# Altium PCB PCB1.PcbDoc
Units mil, origin at the board's own origin, x right, y up, seen from the top; angles counter-clockwise.
Board outline 6000 x 4000 mil, 2 copper layers (Top Layer, Bottom Layer); 5 components, 0 nets, 70 pads, 18 vias.
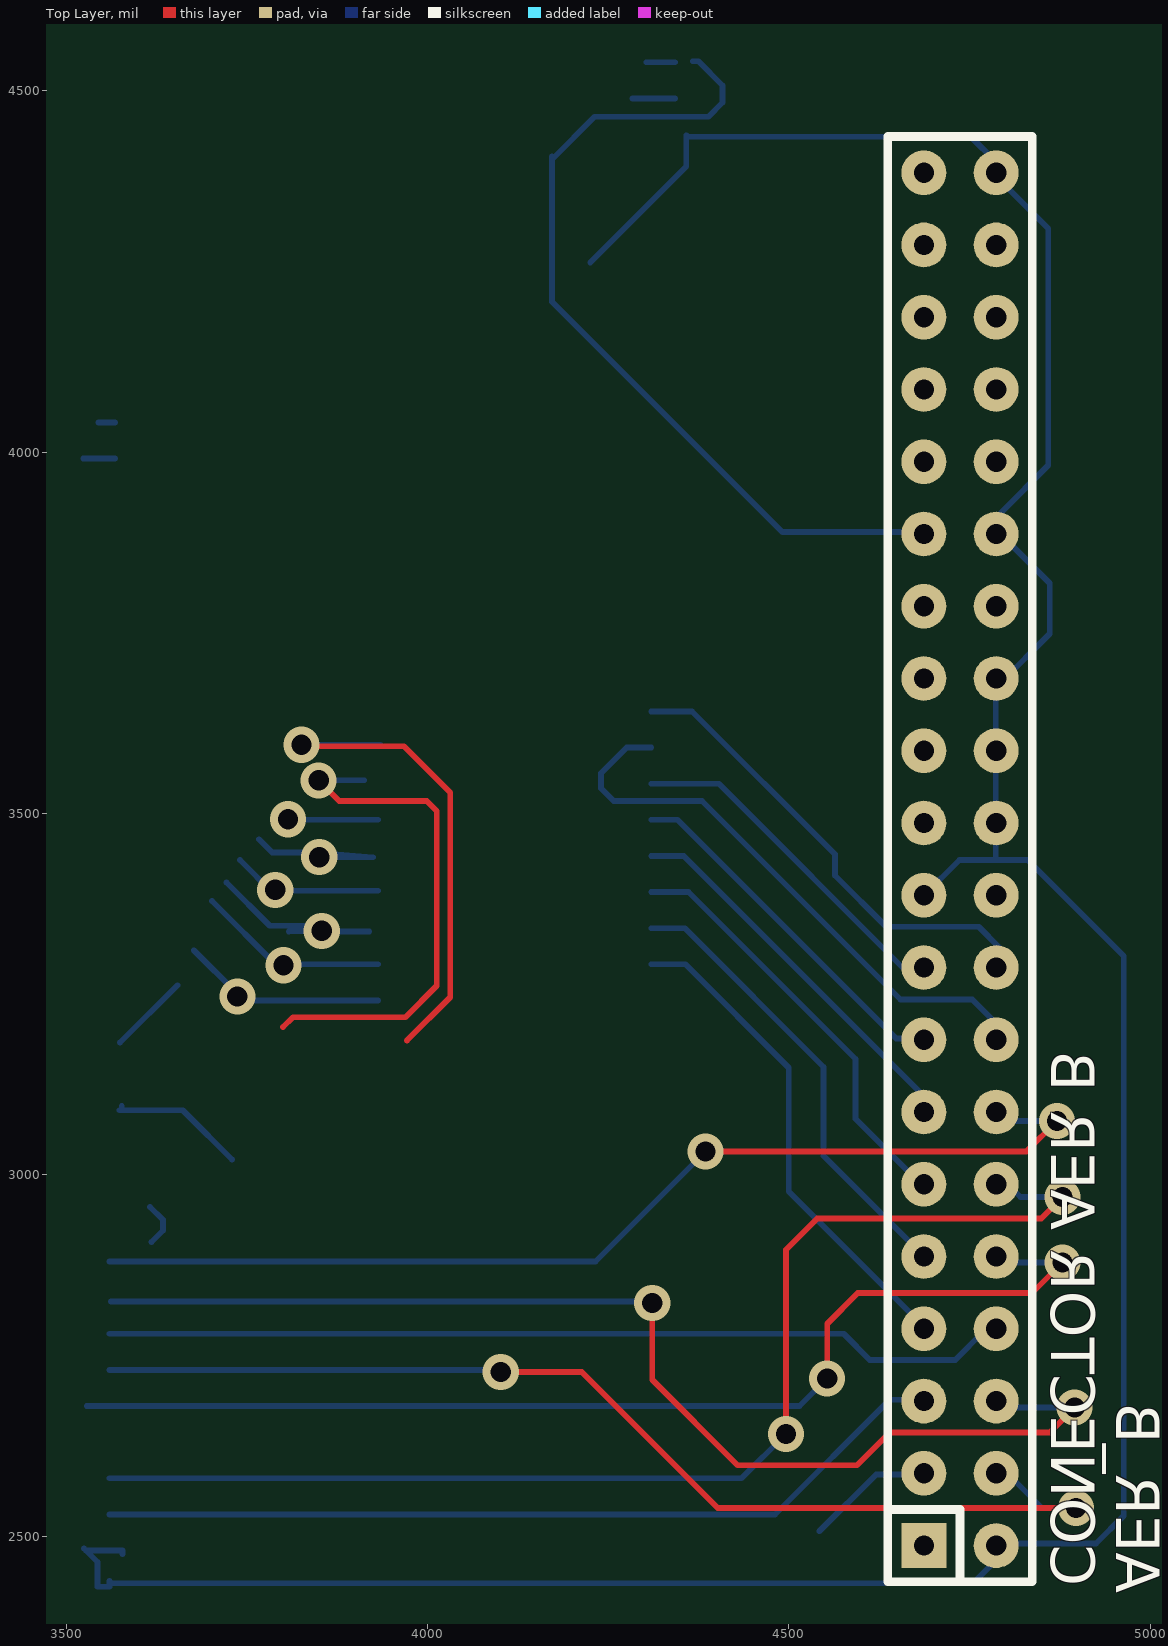
[diagram p0: Top Layer view]
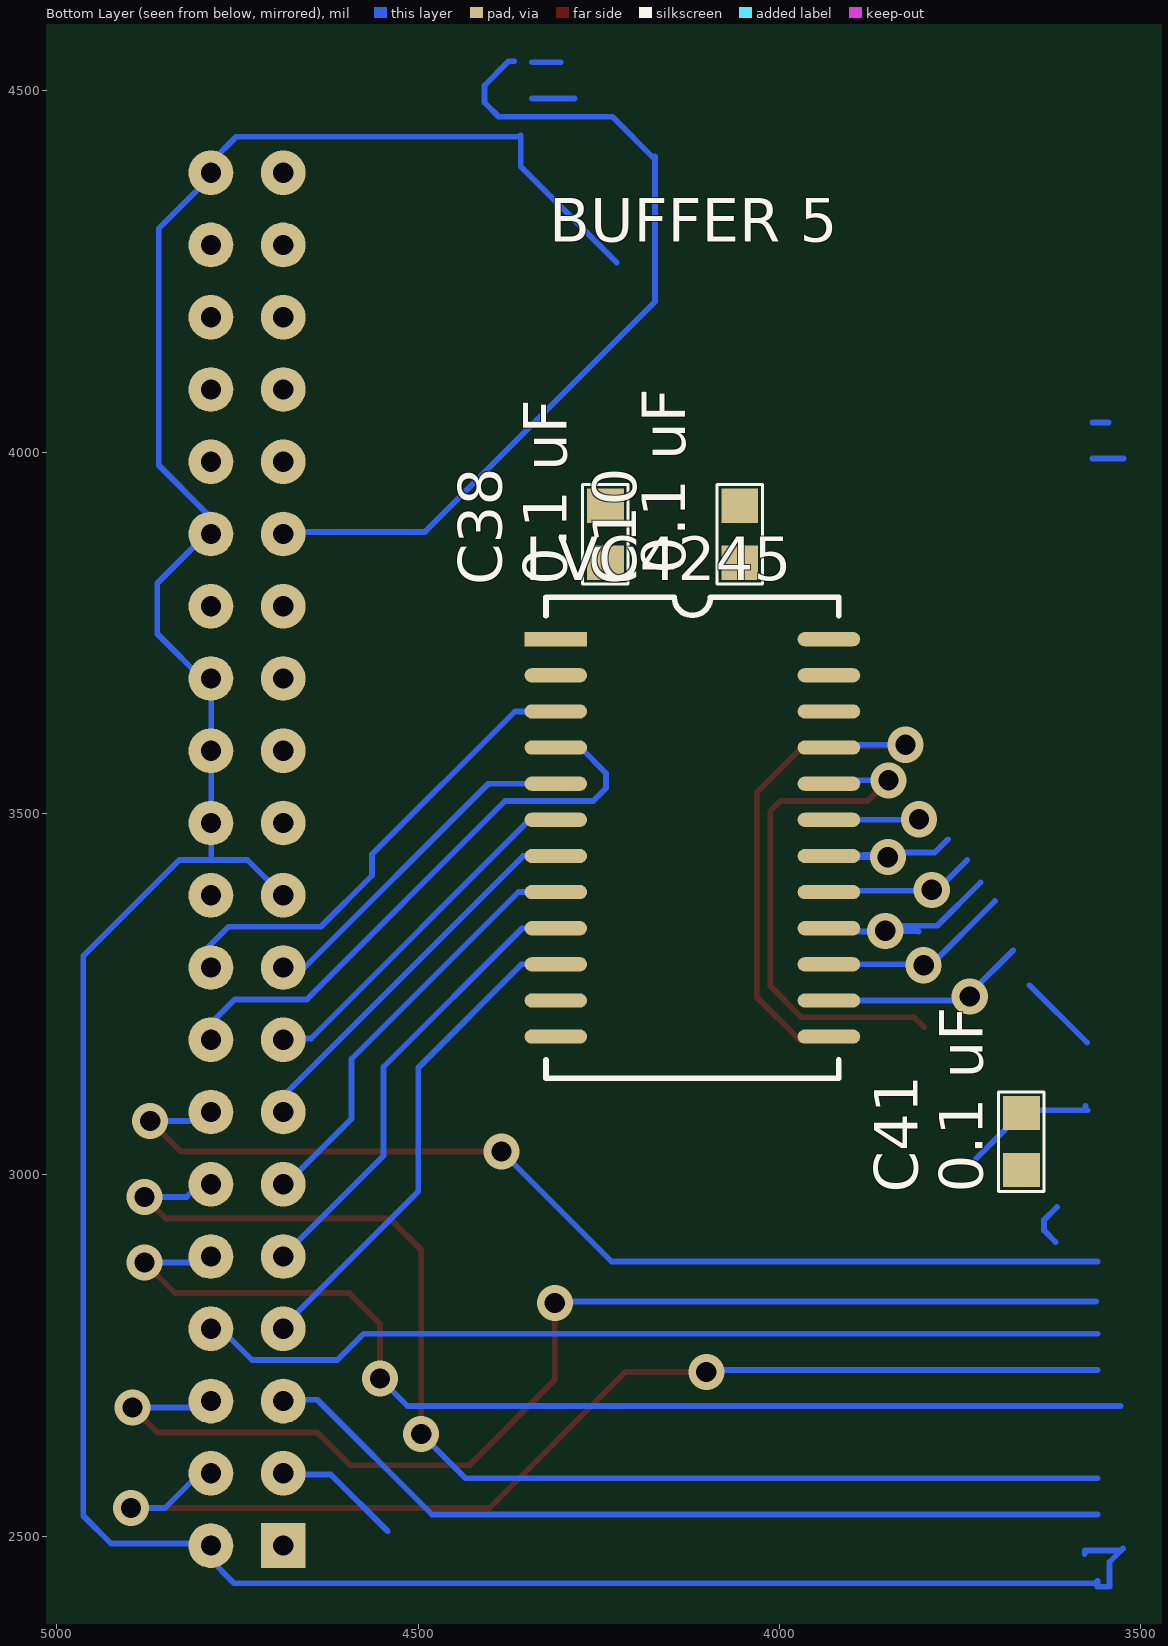
[diagram p1: Bottom Layer view, seen from below]

## Layer stack, top to bottom
Top Layer: signal copper 1.4
Dielectric: dielectric 12.6, FR-4, Dk 4.8
Bottom Layer: signal copper 1.4

## Board outline
1000,1000 7000,1000 7000,5000 1000,5000

## Design rules (kind name [scope] priority, off if disabled: settings)
Clearance [All] p1: gap=10
ComponentClearance [All] p1: gap=10 collisioncheckmode=0
PolygonConnect [All] p1: connectstyle=Relief reliefconductorwidth=10 reliefentries=4 polygonreliefangle="90 Angle"
RoutingLayers [All] p1: top layer=Horizontal bottom layer=Vertical
RoutingVias [All] p1: holewidth=28 width=50 viastyle="Through Hole" minholewidth=28 minwidth=50 maxholewidth=28 maxwidth=50
SolderMaskExpansion [All] p1: expansion=4
TestPointUsage [All] p1: valid=0 allowmultiple=FALSE
Testpoint [All] p1: side=15 testpointundercomponent=TRUE minsize=40 maxsize=100 preferedsize=60 minholesize=0 maxholesize=40 preferedholesize=32 testpointgrid=1 style=1023 order=1234567890
Width [All] p1: maxlimit=10 minlimit=10 preferedwidth=10
16 further rules are at their usual default settings.

## Components (designator, comment, footprint, x,y, rotation, side; value= is the part's Value field where it differs from the comment)
AER_B "CONECTOR AER B" IDC-40 4686.97,2486.89 r90 top
"BUFFER 5" "LVC4245" SOJ24/400-THIN 4309.57,3741.3 r180 bottom
C10 "0.1 uF" "CAP 10" 4055.08,3886.5 r90 bottom
C38 "0.1 uF" "CAP 10" 4241.1,3886.5 r90 bottom
C41 "0.1 uF" "CAP 10" 3665.31,3045.95 r90 bottom

## Footprints (in the part's own frame and the unit in brackets; to place one, negate y for a bottom-side part, rotate by r counter-clockwise, add the part's x,y. Pads: shape width x height; smd on the part's side, far side on the other; paste and mask are expansions set on the pad)
"CAP 10" [mm]
  rect 1.2x1.3 smd: 1(-1,0) 2(1,0)
  silkscreen extent -1.75,-0.8 1.75,0.8
IDC-40 [mil]
  rect 62x62 hole 28: 1(0,0)
  round 62 hole 28: 2(0,-100) 3(100,0) 4(100,-100) 5(200,0) 6(200,-100) 7(300,0) 8(300,-100) 9(400,0) 10(400,-100) 11(500,0) 12(500,-100) 13(600,0) 14(600,-100) 15(700,0) 16(700,-100) 17(800,0) 18(800,-100) 19(900,0) 20(900,-100) 21(1000,0) 22(1000,-100) 23(1100,0) 24(1100,-100) 25(1200,0) 26(1200,-100) 27(1300,0) 28(1300,-100) 29(1400,0) 30(1400,-100) 31(1500,0) 32(1500,-100) 33(1600,0) 34(1600,-100) 35(1700,0) 36(1700,-100) 37(1800,0) 38(1800,-100) 39(1900,0) 40(1900,-100)
  silkscreen extent -50,-150 1950,50
SOJ24/400-THIN [mm]
  rect 2.2x0.5 smd: 1(0,0)
  oval 2.2x0.5 smd: 2(0,-1.27) 3(0,-2.54) 4(0,-3.81) 5(0,-5.08) 6(0,-6.35) 7(0,-7.62) 8(0,-8.89) 9(0,-10.16) 10(0,-11.43) 11(0,-12.7) 12(0,-13.97) 13(9.6,-13.97) 14(9.6,-12.7) 15(9.6,-11.43) 16(9.6,-10.16) 17(9.6,-8.89) 18(9.6,-7.62) 19(9.6,-6.35) 20(9.6,-5.08) 21(9.6,-3.81) 22(9.6,-2.54) 23(9.6,-1.27) 24(9.6,0)
  silkscreen extent -0.34,-15.44 9.95,1.47

## Via types
v1: diameter 50, hole 28, Top Layer to Bottom Layer, 18 vias

## Nets (pads, with @x,y where several pads share a name; then routed paths per layer and width w, separated by ;. In a path a pad name is that pad's centre, name@x,y a point inside that pad or via, vN(x,y) a via of type N, cw(c..) or ccw(c..) an arc to the next point about the centre after c; other vN are vias at no path point)
pads on no net: "BUFFER 5.1" "BUFFER 5.2" "BUFFER 5.3" "BUFFER 5.4" "BUFFER 5.5" "BUFFER 5.6" "BUFFER 5.7" "BUFFER 5.8" "BUFFER 5.9" "BUFFER 5.10" "BUFFER 5.11" "BUFFER 5.12" "BUFFER 5.13" "BUFFER 5.14" "BUFFER 5.15" "BUFFER 5.16" "BUFFER 5.17" "BUFFER 5.18" "BUFFER 5.19" "BUFFER 5.20" "BUFFER 5.21" "BUFFER 5.22" "BUFFER 5.23" "BUFFER 5.24" AER_B.1 AER_B.2 AER_B.3 AER_B.4 AER_B.5 AER_B.6 AER_B.7 AER_B.8 AER_B.9 AER_B.10 AER_B.11 AER_B.12 AER_B.13 AER_B.14 AER_B.15 AER_B.16 AER_B.17 AER_B.18 AER_B.19 AER_B.20 AER_B.21 AER_B.22 AER_B.23 AER_B.24 AER_B.25 AER_B.26 AER_B.27 AER_B.28 AER_B.29 AER_B.30 AER_B.31 AER_B.32 AER_B.33 AER_B.34 AER_B.35 AER_B.36 AER_B.37 AER_B.38 AER_B.39 AER_B.40 C10.1 C10.2 C38.1 C38.2 C41.1 C41.2
copper on no net: | length 24457
  Top Layer w8: v1(3736.77,3246.73) 3739.92,3246.73 v1@3738.35,3245.16 ; v1@3789.33,3390.43 3795.24,3390.43 v1@3799.17,3394.37 ; 3800.16,3204.41 3813.94,3218.19 3969.45,3218.19 4012.76,3261.5 4012.76,3503.62 3998.98,3517.4 3877.91,3517.4 v1(3849.37,3545.95) ; v1@3806.85,3488.86 3803.7,3488.86 v1(3806.85,3492.01) ; v1(3825.75,3595.16) 3827.72,3593.19 3967.48,3593.19 4031.46,3529.21 4031.46,3245.75 3971.42,3185.71 ; v1(4101.34,2727.05) 4213.54,2727.05 4401.54,2539.06 v1(4897.6,2539.06) ; v1(4310.98,2822.52) 4310.98,2716.22 4429.09,2598.11 4594.45,2598.11 4639.72,2643.39 4861.18,2643.39 v1(4895.63,2677.84) ; v1(4384.8,3032.17) 4828.7,3032.17 v1(4871.02,3074.49) ; v1(4496.02,2641.42) 4496.02,2896.34 4539.33,2939.65 4849.37,2939.65 v1(4878.9,2969.17) ; v1(4553.11,2718.19) 4553.11,2793.98 4595.43,2836.3 4836.57,2836.3 v1(4878.9,2878.62)
  Bottom Layer w8: 3523.66,3991.3 3567.36,3991.3 ; 3524.57,2482.95 3527.52,2480 ; 3528.31,2680 3560,2680 4514.92,2680 v1(4553.11,2718.19) ; 3544.53,4041.3 3567.36,4041.3 ; 3560,2437.68 3560,2434.73 ; 3560,2530 4481.06,2530 4639.72,2688.66 4685.2,2688.66 4686.97,2686.89 ; 3560,2580 4434.61,2580 v1(4496.02,2641.42) ; 3560,2730 4098.38,2730 v1(4101.34,2727.05) ; 3560,2780 4575.95,2780 4612.17,2743.78 4730.28,2743.78 4769.65,2783.15 4770.63,2784.13 4768.66,2784.13 ; 3560,2880 4232.64,2880 v1(4384.8,3032.17) ; 3561.97,2824.49 4309.02,2824.49 v1(4310.98,2822.52) ; 3573.78,3089.25 3574.76,3089.25 ; 3574.57,3182.95 3654.1,3262.48 ; 3576.73,3095.16 3576.73,3091.22 3574.76,3089.25 ; 3577.72,2475.08 3577.72,2480 3577.72,2480.14 3560.14,2480.14 3560,2480 3527.52,2480 ; 3616.1,2955.39 3633.82,2937.68 3633.82,2922.91 3618.07,2907.17 ; 3676.54,3310.91 3735.99,3251.46 v1(3736.77,3246.73) ; 3701.73,3379.02 v1@3791.5,3289.25 ; 3721.81,3404.61 3781.65,3344.76 v1@3848.58,3344.76 ; 3729.29,3021.34 3665.31,3085.32 3661.38,3089.25 3576.73,3089.25 3574.76,3089.25 ; 3740.32,3435.51 3785.39,3390.43 v1@3788.35,3387.48 ; v1@3747.72,3241.3 3931.61,3241.3 ; 3766.69,3464.45 3785.2,3445.95 3848.58,3445.95 3850.67,3445.77 3924.37,3439.65 v1(3850.16,3439.65) ; v1@3790.32,3488.86 v1@3790.32,3492.01 ; v1@3801.34,3393.19 3931.61,3393.19 ; v1@3802.44,3291.3 3931.61,3291.3 ; v1(3806.85,3492.01) 3808.5,3491.3 3931.61,3491.3 ; 3807.84,3336.89 v1(3853.7,3337.68) ; v1(3825.75,3595.16) 3935,3595.16 ; v1(3849.37,3545.95) 3912.36,3545.95 ; v1@3853.7,3336.89 3919.25,3336.89 ; 4172.2,4409.13 4172.2,4405.2 ; 4225.35,4262.48 4347.5,4384.63 4358.23,4395.36 4358.23,4438.66 4360.2,4436.69 4751.93,4436.69 4786.97,4401.65 4786.97,4386.89 ; 4283.62,4489.65 4342.48,4489.65 ; 4302.72,4539.65 4342.48,4539.65 ; 4309.57,3291.3 4356.97,3291.3 4499.96,3148.31 4499.96,2977.05 4688.54,2788.46 4690.91,2786.1 ; 4309.57,3341.3 4356.18,3341.3 4548.19,3149.29 4548.19,3026.26 4687.26,2887.19 4691.89,2882.56 ; 4309.57,3391.3 4361.3,3391.3 4592.48,3160.12 4592.48,3077.44 4685,2984.92 4693.86,2976.06 ; 4309.57,3441.3 4354.61,3441.3 4691.89,3104.02 4691.89,3086.89 4691.89,3076.46 4692.87,3077.44 ; 4309.57,3491.3 4345.94,3491.3 4648.58,3188.66 4686.97,3188.66 4688.94,3188.66 ; 4309.57,3541.3 4403.23,3541.3 4662.36,3282.17 4683.03,3282.17 ; 4309.57,3591.3 4275.63,3591.3 4240.12,3555.79 4240.12,3535.12 4257.83,3517.4 4379.88,3517.4 4654.49,3242.8 4753.9,3242.8 4784.41,3212.28 ; 4309.57,3641.3 4366.22,3641.3 4563.94,3443.58 4563.94,3414.06 4634.8,3343.19 4762.76,3343.19 4791.3,3314.65 ; 4367.09,4541.02 4374.96,4541.02 4408.43,4507.56 4408.43,4483.94 4388.74,4464.25 4231.26,4464.25 4172.2,4405.2 ; 4542.28,2506.58 4621.02,2585.32 4684.02,2585.32 ; 4685,3889.45 4491.1,3889.45 4172.2,4208.35 4172.2,4405.2 ; 4688.94,3388.47 4736.18,3435.71 4830.67,3435.71 4963.54,3302.84 4963.54,2528.23 4925.16,2489.84 4795.24,2489.84 ; 4781.46,4393.39 4781.46,4387.48 4784.51,4384.43 4859.21,4309.73 4859.21,3981.97 4793.27,3916.02 4793.27,3886.89 4793.27,3886.5 4861.18,3818.58 4861.18,3748.7 4793.17,3680.69 4786.38,3673.9 4786.38,3586.89 4786.38,3486.89 4786.38,3440.63 ; 4784.41,2876.65 4786.38,2878.62 4786.97,2878.62 v1(4878.9,2878.62) ; 4788.35,2493.78 4788.35,2486.89 4788.35,2468.19 4754.88,2434.73 3560,2434.73 ; 4788.35,2691.61 4790.02,2689.94 4802.13,2677.84 v1(4895.63,2677.84) ; 4788.35,3091.22 4789.82,3089.74 4805.08,3074.49 v1(4871.02,3074.49) ; 4797.2,2992.8 4820.83,2969.17 v1(4878.9,2969.17) ; 4809.02,2582.36 4809.02,2580.39 4850.35,2539.06 v1(4897.6,2539.06) ; 3527.52,2480 3543.27,2464.25 3543.27,2430 3560,2430 3560,2434.73
  other v1: 3800.55,3290.04 3789.33,3394.37